# Altium PCB bmsMaster.PcbDoc (part 2 of 2)
Units mil, origin at the board's own origin, x right, y up, seen from the top; angles counter-clockwise.
Board outline 3600 x 5400 mil, 4 copper layers (Signal 1, Ground, Power, Signal 2), stack 65.512 mil thick; 132 components, 81 nets, 422 pads, 130 vias.
Unrouted connection lines stored in the file: 1.
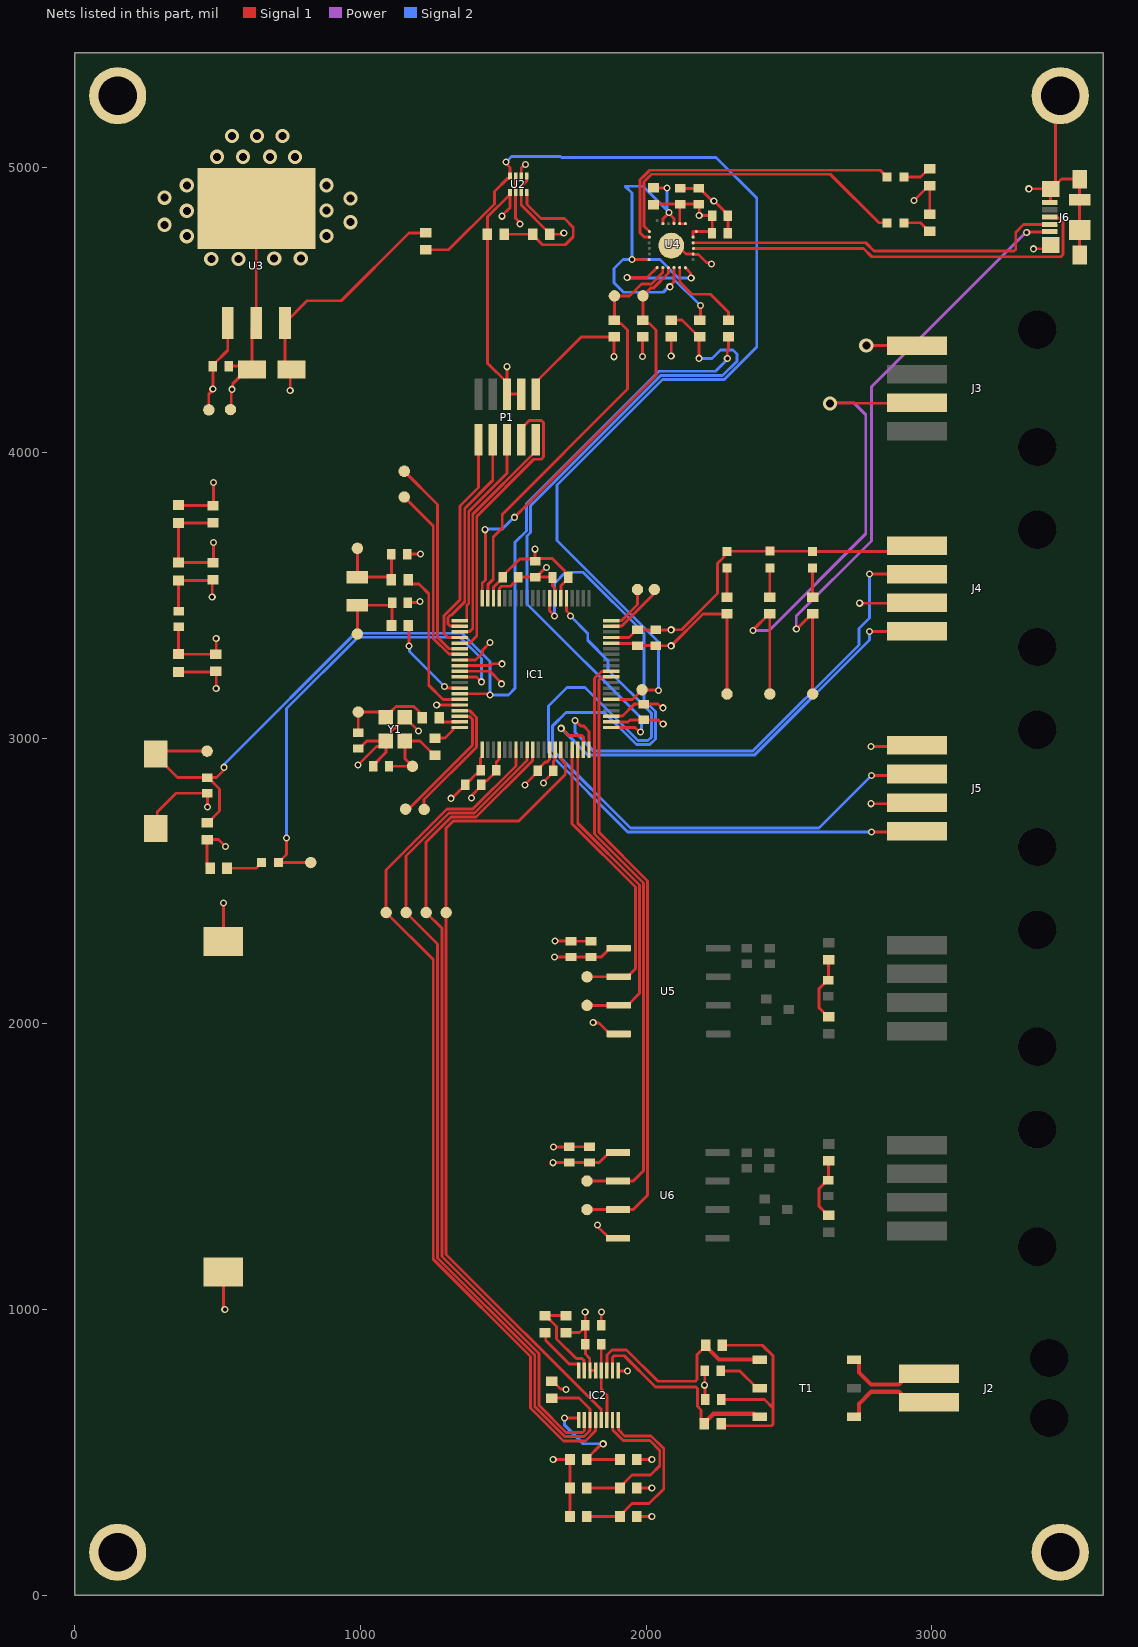
[diagram p4: the nets of this part, all layers, seen from the top]

## Via types
v1: diameter 25, hole 14, Signal 1 to Signal 2, tented both sides, 107 vias
v2: diameter 50, hole 28, Signal 1 to Signal 2, 21 vias
v3: diameter 50, hole 28, Signal 1 to Signal 2, tented both sides, 2 vias

## Nets (pads, with @x,y where several pads share a name; then routed paths per layer and width w, separated by ;. In a path a pad name is that pad's centre, name@x,y a point inside that pad or via, vN(x,y) a via of type N, cw(c..) or ccw(c..) an arc to the next point about the centre after c; other vN are vias at no path point) (continued)
GND: C1.1 C2.1 C3.1 C4.2 C5.1 C7.1 C8.1 C9.1 C10.1 C11.1 C12.1 C13.1 C14.1 C15.1 C16.2 C17.1 C18.1 C19.1 C20.1 C21.1 C22.2 C23.2 C24.1 C25.1 C27.2 C28.2 C32.2 C33.2 D4.1 D5.1 D6.1 IC1.24 IC1.33 IC1.43 IC1.57 IC1.66 IC1.78 IC2.13 IC2.14 J1.1 J3.1 J4.1 J5.1 J6.5 J6.6 J6.7 J6.8 J6.9 J6.10 J6.11 L3.1 P1.3 P1.5 pad.PTH1 pad.PTH2 pad.PTH3 pad.PTH4 R5.1 R10.1 R21.1 R22.1 R23.1 R25.2 R37.1 R38.1 TP14.1 U1.2 U2.1 U3.2 U3.4 U4.2 U4.25 U5.4 U6.4 Y1.2 Y1.4 | length 8373.2
  Signal 1 w10: pad.PTH1@150,5250 pad.PTH1@175.79,5250 ; J1.1@283.27,2685.08 288.46,2690.28 288.46,2741.46 354.44,2807.44 C15.1@463.27,2807.44 464,2806.71 v1(464,2759) ; L3.1@363.27,3232.01 489.8,3232.01 R5.1@493.27,3235.47 495,3233.74 v1(495,3175) ; v1@520,1007.71 U1.2@520,1131.26 ; C17.1@538.56,4303 608,4303 C16.2@620.1,4290.9 ; TP14.1@545,4151 547.5,4153.5 547.5,4219.5 v1(550,4222) 552.87,4224.87 552.87,4241.38 602.39,4290.9 C16.2@620.1,4290.9 ; U3.4@635.27,4855.48 U3.2@635.27,4453.91 620.1,4438.74 C16.2@620.1,4290.9 ; v1(991,2906) 1056.04,2971.04 1068.21,2971.04 1075.66,2978.48 Y1.2@1075.66,2990.66 ; C4.2@992.27,2964.44 996.01,2964.44 1022.23,2990.66 Y1.2@1075.66,2990.66 ; C5.1@1044.71,2902 1044.71,2905.74 1088.8,2949.83 Y1.2@1088.8,2990.66 ; C8.1@1163.39,3645 v1(1210,3645) ; C7.1@1165.83,3475 v1@1202.29,3475 ; v1(1203,3025) 1203,3026.07 Y1.4@1155.73,3073.34 1127.39,3045 1127.39,3042.36 1119.78,3034.75 1117.14,3034.75 1107.13,3024.73 1107.13,3008.98 Y1.2@1088.8,2990.66 ; v1(1389,2791) 1391.87,2793.87 1391.87,2802.57 1422.56,2833.26 C12.1@1422.56,2837 1422.56,2840.74 1432.32,2850.5 1441.8,2850.5 1475.56,2884.26 C13.1@1475.56,2888 1475.56,2916.33 1484.54,2925.3 1484.54,2958.94 IC1.24@1485.31,2959.72 ; IC1.78@1465.63,3490.28 1466.41,3491.06 1466.41,3529.23 1497.44,3560.26 C1.1@1497.44,3564 1497.44,3567.74 1557.7,3628 1603.56,3628 C3.1@1611,3620.56 ; v1(1496,4828) 1496,4830 1523.74,4857.74 U2.1@1523.74,4904.37 ; v1(1513,4301) 1513.13,4300.87 P1.5@1513.13,4245.61 ; U2.1@1523.74,4911.06 U2.1@1523.74,4904.37 ; P1.3@1563.27,4205.12 P1.5@1513.27,4205.12 1513.13,4205.25 P1.5@1513.13,4245.61 ; v1(1576,2837) 1576,2837.82 1620.44,2882.26 C14.1@1620.44,2886 1620.44,2889.74 1648.39,2917.69 1654.09,2917.69 1661.7,2925.3 1661.7,2958.94 IC1.33@1662.48,2959.72 ; v1(1611,3662) C3.1@1611,3620.56 ; v1(1675,475) R21.1@1733.74,475 R22.1@1733.74,375 R23.1@1733.74,275 ; v1(1676,1569) 1676.5,1569.5 1730.77,1569.5 C32.2@1731.27,1570 C33.2@1802,1570 C33.2@1803,1571 ; v1(1681,2290) 1681.22,2289.78 1737.05,2289.78 C27.2@1737.27,2289.56 C28.2@1807.27,2289.56 C28.2@1807.99,2290.28 ; IC1.66@1701.85,3490.28 1702.61,3491.04 1702.61,3534.31 1727.56,3559.26 1717.8,3569.02 1717.8,3583.1 1671.57,3629.32 1621.76,3629.32 C3.1@1612,3619.56 C3.1@1611,3620.56 ; R25.2@1719.27,919.47 1766.39,919.47 C23.2@1787.22,940.31 ; v1(1787,991) 1787.22,990.78 C23.2@1787.22,940.31 ; v1(1815,2005) 1816.91,2003.09 1835.46,2003.09 1873.54,1965 U5.4@1904.06,1965 ; IC2.13@1823.43,787.09 IC2.14@1803.74,787.09 1802.96,787.87 1802.96,828.98 1787.44,844.5 C22.2@1787.44,878 1787.44,940.53 C23.2@1787.22,940.31 ; v1(1830,1296) 1831.91,1294.09 1831.91,1289.36 1871.28,1250 U6.4@1901.79,1250 ; IC1.43@1878.54,3077.36 1879.32,3078.14 1917.08,3078.14 1958.5,3119.56 C10.1@1992,3119.56 1992.22,3119.78 2042.16,3119.78 2054.94,3107 v1(2059,3107) ; IC1.57@1878.54,3352.95 1939.65,3352.95 1966.26,3379.56 C11.1@1970,3379.56 C9.1@2034,3379.56 2034.22,3379.78 2087.78,3379.78 v1(2088,3380) 2124,3380 2250.58,3506.58 2250.58,3612.67 2272.52,3634.61 2272.52,3643.78 2283.74,3655 D5.1@2433.27,3655 2582.8,3655 D6.1@2583.27,3654.53 2928.03,3654.53 J4.1@2948.5,3675 ; U4.25@2088.27,4725 2110.01,4725 2139.54,4695.47 U4.2@2165.04,4695.47 2165.21,4695.47 2166.58,4694.1 2183.5,4694.1 2211.62,4665.98 v1@2221.31,4665.98 ; C18.1@2119.73,4925.56 C19.1@2184,4925.56 2187.74,4925.56 2229.43,4883.87 2234.13,4883.87 v1(2237,4881) 2238.45,4881 2286.35,4833.09 2286.35,4768.35 C20.1@2286,4768 ; C25.1@2205.71,785 2205.35,784.65 2205.35,735.35 v1(2205,735) 2206.22,733.78 2206.22,686.22 C24.1@2207.44,685 ; v3(2771,4375) J3.1@2948.5,4375 ; v1(2788,2971) 2944.5,2971 J5.1@2948.5,2975 ; v1(2938,4883) 2938.31,4883 2990.31,4935 R37.1@2993.27,4935 R38.1@2993.27,4834.53 ; v1(3340,4924) 3415.55,4924 J6.7@3416.61,4922.93 ; v1(3356,4714) 3403.55,4714 J6.6@3416.61,4727.07 ; J6.5@3413.27,4876.18 3416.61,4879.53 J6.7@3416.61,4922.93 ; J6.7@3434.02,4940.33 3434.02,5234.02 pad.PTH2@3450,5250 ; J6.8@3517.99,4692.13 J6.9@3517.99,4779.72 J6.10@3517.99,4886.02 J6.11@3517.99,4957.87 3454.02,4957.87 3419.07,4922.93 J6.7@3416.61,4922.93 ; Y1.2@1075.66,2990.66 Y1.2@1088.8,2990.66 ; P1.5@1513.13,4245.61 1444.21,4314.53 R10.1@1444.21,4765 1444.21,4824.84 U2.1@1523.74,4904.37
  other v1: 525,1000 1209,3479 2229,4661
  other v2: 478,4678 573,4678 698,4680 791,4680 392,4758 881,4759 314,4798 965,4807 392,4847 881,4848 965,4890 314,4893 392,4936 881,4936 771,5035 498,5036 589,5036 683,5036 550,5109 638,5109 727,5109
ISO_EN: IC2.1 R18.1 R21.2 | length 440.5
  Signal 1 w10: v1(1715,620) 1763.46,620 1764.37,619.09 IC2.1@1764.37,612.91 ; v1(1850,530) 1848.09,528.09 1842.93,528.09 1792.8,477.95 R21.2@1792.8,475 R18.1@1908.74,475
  Signal 2 w10: v1(1715,620) 1715,595 1780,530 v1(1850,530)
ISO_Ix_N: IC2.10 R28.1 T1.3 | length 738.6
  Signal 1 w10: IC2.10@1883.26,786.31 1882.8,786.77 1882.8,832.48 1888.65,838.34 1923.66,838.34 2033.07,728.93 2173.82,728.93 2179.68,723.07 2179.68,661.11 2192.01,648.78 2192.01,611.73 R28.1@2203.74,600
  Signal 1 w15: R28.1@2203.74,602.95 2235.97,635.19 2378.08,635.19 2388.27,625 T1.3@2398.31,625
ISO_Ix_P: IC2.11 R27.2 T1.1 | length 767.3
  Signal 1 w10: IC2.11@1863.57,787.87 IC2.11@1862.8,787.09 1862.8,840.76 1880.37,858.34 1931.95,858.34 2041.36,748.93 2172.09,748.93 2177.94,754.78 2177.94,841.72 2208.27,872.05 R27.2@2208.27,875
  Signal 1 w15: R27.2@2208.27,872.05 2255.31,825 T1.1@2398.31,825
ISO_PHA: IC2.8 R20.1 R23.2 | length 672.7
  Signal 1 w10: R23.2@1792.8,275 R20.1@1908.74,275 1908.74,277.95 1951.22,320.43 2010.43,320.43 2062,372 2062,513 2017.44,557.56 1924.44,557.56 1903.07,578.93 1903.07,612.01 IC2.8@1902.17,612.91
ISO_POL: IC2.7 R19.1 R22.2 | length 572.2
  Signal 1 w10: R22.2@1792.8,375 R19.1@1908.74,375 1908.74,377.95 1951.06,420.27 2015.27,420.27 2048,453 2048,507 2013.2,541.8 1920.2,541.8 1883.26,578.74 1883.26,612.13 IC2.7@1882.48,612.91
ISO_xA_N: J2.2 T1.4 | length 338.4
  Signal 1 w15: T1.4@2728.23,625 2738.27,625 2745.73,632.46 2745.73,669.73 2788.5,712.5 2884.62,712.5 2893.41,703.71 2893.41,699.98 2918.39,675 J2.2@2990.83,675
ISO_xA_P: J2.1 T1.6 | length 339
  Signal 1 w15: T1.6@2728.23,825 2738.27,825 2745.73,817.54 2745.73,779.27 2787.5,737.5 2884.62,737.5 2893.41,746.29 2893.41,750.02 2918.39,775 J2.1@2990.83,775
MCU_CAN_RX1: IC1.37 TP26.1 U5.2 | length 1039.7
  Signal 1 w10: IC1.37@1741.22,2959.72 1741.22,2700.99 1963,2479.21 1963,2193.43 1934.57,2165 U5.2@1904.06,2165 TP26.1@1793.27,2165
MCU_CAN_RX2: IC1.51 TP28.1 U6.2 | length 2076.3
  Signal 1 w10: TP28.1@1793.27,1450 U6.2@1901.79,1450 1955,1450 1991,1486 1991,2493.63 1820,2664.63 1820,3210.05 1844.01,3234.06 1877.76,3234.06 IC1.51@1878.54,3234.84
MCU_CAN_TX1: IC1.38 TP25.1 U5.3 | length 1143.1
  Signal 1 w10: IC1.38@1760.91,2959.72 1760.91,2702.52 1977,2486.42 1977,2107.43 1934.57,2065 U5.3@1904.06,2065 TP25.1@1793.27,2065
MCU_CAN_TX2: IC1.50 TP27.1 U6.3 | length 2155.8
  Signal 1 w10: TP27.1@1793.27,1350 U6.3@1901.79,1350 1955,1350 2005,1400 2005,2500.85 1835,2670.85 1835,3205.25 1844.12,3214.38 1877.76,3214.38 IC1.50@1878.54,3215.16
MCU_ISO_SPI0_MISO: IC1.29 IC2.3 R26.1 TP22.1 | length 3184.3
  Signal 1 w10: IC1.29@1583.74,2959.72 1582.96,2958.94 1582.96,2921.76 1399.2,2738 1310.57,2738 1160,2587.43 TP22.1@1160,2390 1270,2280 1270,1180.8 1610,840.8 1610,660.2 1715.2,555 1782.48,555 1803.74,576.26 1803.74,651.26 1765,690 R26.1@1670,690
MCU_ISO_SPI0_MOSI: IC1.30 IC2.2 TP21.1 | length 2901.4
  Signal 1 w10: IC1.30@1603.43,2959.72 1602.65,2958.94 1602.65,2921.65 1405,2724 1317.79,2724 1230,2636.21 TP21.1@1230,2390 1285,2335 1285,1185.6 1625,845.6 1625,665 1720,570 1777.11,570 1784.06,576.94 IC2.2@1784.06,612.91
MCU_ISO_SPI0_nCS: IC1.35 IC2.5 TP24.1 | length 2884.9
  Signal 1 w10: IC1.35@1701.85,2959.72 1702.63,2958.94 1702.63,2925.3 1717,2910.93 1717,2873 1554,2710 1325,2710 1300,2685 TP24.1@1300,2390 1300,1193 1843.11,649.89 IC2.5@1843.11,612.91
MCU_ISO_SPI0_SCK: IC1.27 IC2.4 TP23.1 | length 3082.8
  Signal 1 w10: IC1.27@1544.37,2959.72 1544.37,2902.97 1393.4,2752 1303.36,2752 1090,2538.64 TP23.1@1090,2390 1255,2225 1255,1176 1595,836 1595,655.4 1710.4,540 1788,540 1823.43,575.43 IC2.4@1823.43,612.91
MCU_JTAG_nTRST: IC1.4 P1.10 | length 789.4
  Signal 1 w10: IC1.4@1347.99,3352.95 1307.05,3352.95 1291.96,3368.04 1291.96,3429.1 1347.99,3485.13 1347.99,3812.99 1413.27,3878.27 P1.10@1413.27,4044.88
MCU_JTAG_TCK: IC1.5 P1.4 | length 1060.8
  Signal 1 w10: IC1.5@1347.99,3333.27 1348.77,3334.05 1382.41,3334.05 1407,3358.64 1407,3777.05 1606.91,3976.96 1633.22,3976.96 1640.83,3984.58 1640.83,4105.19 1633.22,4112.8 1590.83,4112.8 1563.27,4085.24 P1.4@1563.27,4044.88
MCU_JTAG_TDI: IC1.2 P1.8 | length 757.3
  Signal 1 w10: IC1.2@1347.99,3392.32 1347.21,3393.1 1313.57,3393.1 1305.96,3400.72 1305.96,3423.3 1313.57,3430.91 1317.81,3430.91 1365,3478.1 1365,3805 1463.27,3903.27 P1.8@1463.27,4044.88
MCU_JTAG_TDO: IC1.1 P1.6 | length 714.9
  Signal 1 w10: IC1.1@1347.99,3412.01 1371.12,3412.01 1372.03,3412.91 1372.03,3465.33 1379,3472.3 1379,3794 1513.27,3928.27 P1.6@1513.27,4044.88
MCU_JTAG_TMS: IC1.3 P1.2 | length 801.8
  Signal 1 w10: IC1.3@1347.99,3372.64 1348.77,3373.42 1382.41,3373.42 1393,3384.01 1393,3784.26 1613.27,4004.53 P1.2@1613.27,4044.88
MCU_nNMI: IC1.41 R13.1 R17.1 | length 2384.6
  Signal 1 w10: IC1.41@1878.54,3037.99 1960.95,3037.99 1976.94,3022 v1(1981,3022) ; R13.1@2088.27,4464.53 2126.26,4464.53 2185.31,4405.47 R17.1@2188.27,4405.47 2185.68,4402.88 v1(2185.68,4330.68)
  Signal 2 w10: v1(1981,3022) 1983.87,3024.87 1983.87,3048.93 1986.36,3051.41 1986.36,3068 1583.5,3470.86 1583.5,3708.59 1595.5,3720.59 1595.5,3814.29 2051.21,4270 2268,4270 2318,4320 2318,4346 2304,4360 2260.53,4360 2230.53,4330 2186.36,4330 v1(2185.68,4330.68)
MCU_nRST: C15.2 IC1.14 J1.2 R8.1 R16.1 TP13.1 | length 3825.6
  Signal 1 w10: R8.1@463.27,2704.53 466.22,2704.53 507,2745.31 507,2822.57 C15.2@467.01,2862.56 ; TP13.1@463.27,2955 293.35,2955 J1.2@283.27,2944.92 283.27,2939.02 359.72,2862.56 495.56,2862.56 520.41,2887.41 520.41,2896.76 v1(522.32,2898.68) ; IC1.14@1347.99,3156.1 IC1.14@1347.99,3156.1 1447.24,3156.05 1451.29,3152 v1(1454,3152) ; v1(2284.46,4330) 2284.46,4358.96 2288,4362.5 2288,4405.2 R16.1@2288.27,4405.47
  Signal 2 w10: v1(522.32,2898.68) 524.24,2900.59 524.24,2910.24 982,3368 1355,3368 1406.54,3316.46 1454,3269 v1(1454,3152) 1518,3152 1541.5,3175.5 1541.5,3686.39 1581.5,3726.39 1581.5,3821.5 2045,4285 2243,4285 2284.46,4326.46 v1(2284.46,4330)
MCU_nRSTOUT: D3.1 IC1.11 TP7.1 | length 1645.6
  Signal 1 w10: v1(741,2651) 741,2593.2 D3.1@712.8,2565 TP7.1@826,2565 ; IC1.11@1347.99,3215.16 1348.07,3215.08 1405.72,3215.08 1422.8,3198 v1(1424,3198)
  Signal 2 w10: v1(741,2651) 741,3104 991,3354 1349,3354 1424,3279 v1(1424,3198)
MCU_RTCX1: IC1.13 R6.1 | length 322.3
  Signal 1 w10: R6.1@1167.8,3395 1170,3392.8 v1(1170,3323) ; v1(1294.41,3181) 1297.12,3181 1302.43,3175.69 1347.89,3175.69 IC1.13@1347.99,3175.79
  Signal 2 w10: v1(1170,3323) 1171.91,3321.09 1171.91,3303.5 v1(1294.41,3181)
MCU_RTCX2: IC1.15 R7.1 | length 543.2
  Signal 1 w10: R7.1@1167.32,3555 1167.32,3552.05 1179.06,3540.31 1204.69,3540.31 1239,3506 1239,3186 1288.58,3136.42 IC1.15@1347.99,3136.42
MCU_RXD0: IC1.80 R15.1 TP20.1 U4.21 | length 1513.8
  Signal 1 w10: IC1.80@1426.26,3490.28 1426.26,3543.26 1437.5,3554.5 1437.5,3729.43 v1(1436.54,3730.39) ; v1(1539,3774) 1662.13,3897.13 1662.13,3898.02 2035,4270.9 2035,4430 2012.2,4452.8 2000,4452.8 R15.1@1988.27,4464.53 1989,4465.26 TP20.1@1989,4549 2016.05,4576.05 2024.87,4576.05 2078.3,4629.48 2078.3,4647.5 U4.21@2078.43,4647.62
  Signal 2 w10: v1(1436.54,3730.39) 1438.65,3732.5 1496.6,3732.5 1538.1,3774 v1(1539,3774)
MCU_RXD2: IC1.40 J4.2 | length 1777.1
  Signal 1 w10: v1(1751,3063) 1771.45,3042.55 1781.74,3042.55 1800.28,3024.02 IC1.40@1800.28,2959.72 ; v1(2782,3575) J4.2@2948.5,3575
  Signal 2 w10: v1(1751,3063) 1751,3021 1817,2955 2373.14,2955 2745,3326.86 2745,3384 2782,3421 v1(2782,3575)
MCU_RXD3: IC1.68 J5.2 | length 2974.8
  Signal 1 w10: IC1.68@1662.48,3490.28 1662.48,3446.24 1679,3429.72 v1(1679,3428) ; v1(2789,2870) 2943.5,2870 J5.2@2948.5,2875
  Signal 2 w10: v1(1679,3428) 1679,3542.47 1718.03,3581.5 1779.5,3581.5 1992.5,3368.5 1992.5,3133.61 2032.5,3093.61 2032.5,2997.7 2012.8,2978 1966.31,2978 1853.81,3090.5 1719.61,3090.5 1673,3043.89 1673,2958 1945,2686 2605,2686 v1(2789,2870)
MCU_TXD0: IC1.79 R14.1 TP19.1 U4.20 | length 1509
  Signal 1 w10: IC1.79@1445.94,3490.28 1445.94,3537.94 1465,3557 1465,3705 1496.3,3736.3 1496.3,3784.2 1935,4222.89 1935,4430 1912.2,4452.8 1900,4452.8 R14.1@1888.27,4464.53 1889,4465.26 TP19.1@1889,4549 1942,4549 1984.05,4591.05 2018.65,4591.05 2058.62,4631.01 2058.62,4648.11 U4.20@2058.74,4648.23
MCU_TXD2: IC1.39 J4.4 | length 1616.3
  Signal 1 w10: v1(1703,3035) 1728.38,3009.62 1774.73,3009.62 1780.59,3003.76 IC1.39@1780.59,2959.72 ; v1(2782,3374) 2947.5,3374 J4.4@2948.5,3375
  Signal 2 w10: v1(1703,3035) 1797,2941 2378.94,2941 2782,3344.06 v1(2782,3374)
MCU_TXD3: IC1.65 J5.4 | length 2648.9
  Signal 1 w10: IC1.65@1721.54,3490.28 1721.54,3445.52 1735,3432.06 v1(1735,3428) ; v1(2789,2672) 2945.5,2672 J5.4@2948.5,2675
  Signal 2 w10: v1(1735,3428) 1795.55,3367.45 1795.55,3343.45 1867.23,3271.77 1867.23,3239.08 2018.5,3087.81 2018.5,3003.5 2007,2992 1972.11,2992 1786.11,3178 1723,3178 1658,3113 1658,2950 1936,2672 v1(2789,2672)
MCU_VBAT: IC1.16 U1.1 | length 215.8
  Signal 1 w10: U1.1@520,2288.74 521,2289.74 v1(521,2423) ; v1(1267,3117) 1267.13,3116.87 1347.86,3116.87 IC1.16@1347.99,3116.73
MCU_VDDA: IC1.8 L1.1 L2.2 R1.1 R4.2 | length 587.1
  Signal 1 w10: R1.1@483.27,3755.47 481.3,3753.5 L1.1@363.27,3753.5 L2.2@363.27,3615 R4.2@483.27,3615 485,3616.73 v1(485,3685) ; IC1.8@1347.99,3274.21 1403.21,3274.21 1427.17,3298.17 1427.17,3308.17 v1(1454,3335)
MCU_VREFP: C6.2 IC1.10 L2.1 R4.1 | length 453.2
  Signal 1 w10: C6.2@363.27,3445 L2.1@363.27,3552.01 479.33,3552.01 R4.1@481,3553.68 ; v1(481,3495) R4.1@481,3553.68 ; R4.1@483.27,3555.94 R4.1@481,3553.68 ; IC1.10@1347.99,3234.84 1453.16,3234.84 1494,3194 v1(1494,3191)
MCU_VSSA: C6.1 IC1.9 L3.2 R5.2 | length 432.1
  Signal 1 w10: C6.1@363.27,3389.88 L3.2@363.27,3295 363.74,3294.53 R5.2@493.27,3294.53 495,3296.26 v1(495,3350) ; IC1.9@1347.99,3254.53 1455.5,3254.53 1462.1,3261.13 1495.87,3261.13 v1(1496,3261)
MCU_XTAL1: IC1.19 R3.2 | length 84.8
  Signal 1 w10: R3.2@1278.2,3074.68 R3.2@1275.53,3072 1275.53,3069.41 1287.26,3057.68 IC1.19@1347.99,3057.68 IC1.19@1347.21,3056.9
MCU_XTAL2: IC1.20 R2.1 | length 107.4
  Signal 1 w10: R2.1@1261,3000.53 1295.69,3000.53 1323.96,3028.8 1323.96,3037.09 1324.86,3037.99 IC1.20@1347.99,3037.99
NetC4_1: C4.1 R3.1 TP2.1 Y1.1 | length 344.4
  Signal 1 w10: C4.1@992.27,3019.56 TP2.1@992.27,3092 1070.14,3092 Y1.1@1088.8,3073.34 1109.39,3093.93 1109.39,3096.57 1124.76,3111.93 1186.71,3111.93 1204.74,3093.9 1204.74,3083.73 R3.1@1216.47,3072
NetC5_2: C5.2 R2.2 TP1.1 Y1.3 | length 307.7
  Signal 1 w10: C5.2@1099.83,2902 TP1.1@1182.27,2902 1155.73,2928.54 Y1.3@1155.73,2990.66 1208.86,2990.66 1258.05,2941.47 R2.2@1261,2941.47
NetC7_2: C7.2 R6.2 TP8.1 Y2.1 | length 301.6
  Signal 1 w10: TP8.1@989.13,3365.21 Y2.1@989.13,3466 1105.45,3466 1110.71,3471.26 1110.71,3396.97 R6.2@1108.74,3395
NetC8_2: C8.2 R7.2 TP9.1 Y2.2 | length 325.6
  Signal 1 w10: TP9.1@989.13,3665.21 Y2.2@989.13,3564.43 1096.54,3564.43 1101.69,3559.27 1101.69,3548.43 R7.2@1108.27,3555 C8.2@1108.27,3645
NetC24_2: C24.2 R27.1 R28.2 | length 818.1
  Signal 1 w10: C24.2@2260.83,696.26 C24.2@2260.83,700 ; C24.2@2262.56,685 2414.14,685 2445,654.14 ; R28.2@2262.8,600 2269.8,593 2439.14,593 2445,598.86 2445,654.14 ; R27.1@2267.32,875 2407,875 2445,837 2445,654.14
NetC25_2: C25.2 T1.2 | length 166.1
  Signal 1 w10: C25.2@2260.83,781.26 C25.2@2260.83,785 2328.27,785 2388.27,725 T1.2@2398.31,725
NetC26_2: C26.2 R29.1 R30.2 | length 233.9
  Signal 1 w10: R30.2@2640,2024.53 2637.05,2024.53 2605,2056.57 2605,2123.03 2634.53,2152.56 C26.2@2638.27,2152.56 2638.27,2223.74 R29.1@2640,2225.47
NetC31_2: C31.2 R31.1 R32.2 | length 223.9
  Signal 1 w10: R32.2@2640,1329.53 2637.05,1329.53 2605,1361.57 2605,1423.03 2634.53,1452.56 C31.2@2638.27,1452.56 2638.27,1518.74 R31.1@2640,1520.47
NetD3_2: D3.2 R33.1 | length 129.2
  Signal 1 w10: R33.1@532.8,2545 633.74,2545 D3.2@653.74,2565
NetD4_2: D4.2 R34.1 | length 100.9
  Signal 1 w10: R34.1@2283.27,3494.53 D4.2@2283.27,3595.47
NetD5_2: D5.2 R35.1 | length 101.4
  Signal 1 w10: R35.1@2433.27,3494.53 D5.2@2433.27,3595.94
NetD6_2: D6.2 R36.1 | length 100.9
  Signal 1 w10: R36.1@2583.27,3494.53 D6.2@2583.27,3595.47
NetD7_1: D7.1 R37.2 | length 102.5
  Signal 1 w10: D7.1@2902.8,4965 2961.26,4965 2990.31,4994.06 R37.2@2993.27,4994.06
NetD8_1: D8.1 R38.2 | length 102.7
  Signal 1 w10: D8.1@2902.8,4805 2960.79,4805 2990.31,4775.47 R38.2@2993.27,4775.47
NetIC1_6: IC1.6 TP5.1 | length 724.1
  Signal 1 w10: TP5.1@1153.27,3935 1270,3818.27 1270,3354 1310.42,3313.58 IC1.6@1347.99,3313.58
NetIC1_7: IC1.7 TP6.1 | length 653.8
  Signal 1 w10: TP6.1@1153.27,3845 1255,3743.27 1255,3349.2 1309.52,3294.68 1347.21,3294.68 IC1.7@1347.99,3293.9
NetIC1_17: IC1.17 TP12.1 | length 465.6
  Signal 1 w10: TP12.1@1223,2751 1223,2786 1406,2969 1406,3072.79 1382.53,3096.27 1348.77,3096.27 IC1.17@1347.99,3097.05
NetIC1_18: IC1.18 TP11.1 | length 466.1
  Signal 1 w10: TP11.1@1158,2752 1166.12,2752 1175.87,2761.75 1177.75,2761.75 1392,2976 1392,3066.99 1382.41,3076.58 1348.77,3076.58 IC1.18@1347.99,3077.36
NetIC1_59: IC1.59 TP4.1 | length 211.8
  Signal 1 w10: IC1.59@1878.54,3392.32 1879.32,3393.1 1914.9,3393.1 2023.26,3501.46 2023.26,3515.26 TP4.1@2029,3521
NetIC1_60: IC1.60 TP3.1 | length 167.6
  Signal 1 w10: IC1.60@1878.54,3412.01 1879.45,3412.91 1914.91,3412.91 1970,3468 TP3.1@1970,3521
NetIC2_15: IC2.15 R24.2 R25.1 | length 332.3
  Signal 1 w10: R24.2@1646,978.53 R24.2@1648.95,978.53 ; R25.1@1719.27,978.53 R24.2@1648.95,978.53 ; IC2.15@1784.06,787.09 1783.28,787.87 1783.28,820.52 1775.66,828.14 1755.8,828.14 1686.58,897.36 1686.58,940.9 R24.2@1648.95,978.53
NetIC2_16: IC2.16 R24.1 | length 201
  Signal 1 w10: R24.1@1646,919.47 1648.95,916.52 1648.95,891.05 1730.06,809.94 1763.46,809.94 1764.37,809.04 IC2.16@1764.37,787.09
NetR9_1: R9.1 R10.2 U2.4 | length 540.7
  Signal 1 w10: R10.2@1503.27,4765 R9.1@1603.27,4765 1603.27,4762.05 1637.31,4728 1717,4728 1745,4756 1745,4789 1714,4820 1632,4820 1582.8,4869.2 U2.4@1582.8,4911.06
NetR12_1: R12.1 U4.9 U4.11 U4.18 U4.22 U4.24 | length 1442.7
  Signal 1 w10: v1(1951,4676) 1983.06,4676 1983.27,4675.79 U4.18@2010.89,4675.79 ; R12.1@2026,4927.53 2026.53,4927 v1(2073,4927) ; U4.11@2058.74,4801.77 2058.86,4801.89 2058.86,4818.99 v1(2080.88,4841) 2080.88,4836.94 2097.99,4819.83 2097.99,4802.5 U4.9@2098.11,4802.38 ; v1(2083,4581) 2083,4583.71 2098.11,4598.82 U4.22@2098.11,4648.23 ; U4.24@2137.48,4647.62 2156.09,4629.01 2156.09,4613.91 v1(2158,4612)
  Signal 2 w10: v1(2073,4927) 2073,4852.94 2080.88,4845.06 v1(2080.88,4841) 1989.09,4932.8 1927,4932.8 1951,4908.8 v1(1951,4676) ; v1(2083,4581) 2078.94,4581 2059.94,4562 1921,4562 1888,4595 1888,4645 1919,4676 v1(1951,4676) ; v1(2158,4612) 2112.8,4612 2048.8,4676 v1(1951,4676)
NetR16_2: R16.2 U4.23 | length 292.4
  Signal 1 w10: U4.23@2117.8,4648.23 2117.8,4597.2 2160,4555 2225,4555 2288.27,4491.73 R16.2@2288.27,4464.53
NetR17_2: R17.2 U4.19 | length 467.4
  Signal 1 w10: v1(1934,4613) 2003.83,4613 U4.19@2039.06,4648.23 ; R17.2@2188.27,4464.53 2190,4466.26 v1(2190,4515)
  Signal 2 w10: v1(1934,4613) 1935,4612 2093,4612 v1(2190,4515)
P3V3_MAIN: C1.2 C2.2 C3.2 C9.2 C10.2 C11.2 C12.2 C13.2 C14.2 C16.1 C18.2 C19.2 C20.2 C21.2 C22.1 C23.1 C27.1 C28.1 C32.1 C33.1 IC1.21 IC1.34 IC1.42 IC1.56 IC1.67 IC1.77 IC2.6 IC2.9 IC2.12 J4.3 J5.3 L1.2 P1.1 R1.2 R8.2 R11.1 R12.2 R13.2 R14.2 R15.2 R18.2 R19.2 R20.2 R26.2 R33.2 R34.2 TP18.1 U3.3 U4.5 U4.6 U4.7 U4.8 U5.1 U6.1 | length 5379.2
  Signal 1 w10: L1.2@363.27,3816.5 365.24,3814.53 R1.2@483.27,3814.53 486,3817.26 v1(486,3896) ; R33.2@473.74,2545 463.27,2555.47 R8.2@463.27,2645.47 502.53,2645.47 v1(527,2621) ; v1(754,4218) 754,4287 C16.1@757.9,4290.9 735.27,4313.53 U3.3@735.27,4453.91 813.36,4532 933,4532 1170.53,4769.53 R11.1@1228.27,4769.53 ; v1(1317,2790) 1320.44,2790 1353.94,2823.5 1357.68,2823.5 1367.44,2833.26 C12.2@1367.44,2837 ; C12.2@1365.71,2839.01 1377.2,2850.5 1380.94,2850.5 1404.94,2874.5 1410.68,2874.5 1420.44,2884.26 C13.2@1420.44,2888 1420.44,2930.78 1426.26,2936.59 IC1.21@1426.26,2959.72 ; IC1.77@1485.31,3490.28 1486.09,3491.06 1486.09,3524.7 1493.89,3532.5 1524.8,3532.5 1552.56,3560.26 C1.2@1552.56,3564 1553,3564.44 C3.2@1615.74,3564.44 ; P1.1@1613.27,4205.12 1613.27,4245.47 1773.27,4405.47 R14.2@1888.27,4405.47 1888,4405.2 v1(1888,4336) ; v1(1641,2843) 1643.87,2845.87 1643.87,2850.57 1675.56,2882.26 C14.2@1675.56,2886 1675.56,2919.48 1681.39,2925.3 1681.39,2958.94 IC1.34@1682.17,2959.72 ; v1(1651.86,3597.71) 1649.01,3597.71 C3.2@1615.74,3564.44 ; R26.2@1670,749.06 1672.95,749.06 1700.09,721.91 1718.09,721.91 v1(1720,720) ; v1(1674,1514) 1674.44,1514.44 1730.83,1514.44 C32.1@1731.27,1514.88 C33.1@1802,1514.88 1836.16,1514.88 1871.28,1550 U6.1@1901.79,1550 ; v1(1680,2234) 1680.22,2234.22 1737.05,2234.22 C27.1@1737.27,2234.44 C28.1@1807.27,2234.44 1842.98,2234.44 1873.54,2265 U5.1@1904.06,2265 ; IC1.67@1682.17,3490.28 1681.39,3491.06 1681.39,3524.7 1672.44,3533.64 C2.2@1672.44,3563 1671,3564.44 C3.2@1615.74,3564.44 ; C22.1@1842.56,878 1842.83,877.72 1842.83,787.36 IC2.12@1843.11,787.09 1843.11,720.89 1862.8,701.2 IC2.6@1862.8,612.91 ; C23.1@1842.56,944.27 1841.78,945.05 1843.28,946.55 1843.28,990.28 v1(1844,991) ; IC1.42@1878.54,3057.68 1936.77,3057.68 1943.53,3064.44 C10.2@1992,3064.44 1992.28,3064.72 2041.22,3064.72 2055.94,3050 v1(2060,3050) ; IC1.56@1878.54,3333.27 1879.32,3332.49 1961.95,3332.49 C11.2@1970,3324.44 C9.2@2034,3324.44 2034.22,3324.22 2087.78,3324.22 v1(2088,3324) 2199.47,3435.47 R34.2@2283.27,3435.47 TP18.1@2283.27,3155 ; IC2.9@1902.17,787.09 1902.17,785.49 1903.07,784.58 v1(1934.58,784.58) ; R20.2@1967.8,275 v1(2020,275) ; R19.2@1967.8,375 v1(2020,375) ; R18.2@1967.8,475 v1(2020,475) ; v1(1988,4337) 1988,4405.2 R15.2@1988.27,4405.47 ; R12.2@2039,4869.47 2039.97,4870.44 2115.86,4870.44 C18.2@2117.8,4868.5 ; v1(2088,4338) 2088,4405.2 R13.2@2088.27,4405.47 ; U4.7@2137.48,4801.77 U4.8@2117.8,4801.77 C18.2@2117.8,4868.5 ; U4.5@2165.16,4754.65 U4.5@2165.04,4754.53 2164.92,4754.65 2164.92,4774.33 2224.55,4774.33 C20.2@2230.88,4768 2231.59,4768.71 C21.2@2231.59,4829 2230.59,4830 v1(2186,4830) 2186,4868.44 C19.2@2184,4870.44 C18.2@2119.73,4870.44 C18.2@2117.8,4868.5 ; v1(2747.91,3473.09) 2946.59,3473.09 J4.3@2948.5,3475 ; v1(2787,2771) 2944.5,2771 J5.3@2948.5,2775
P5V0_BAT: J3.3 R9.2 R35.2 TP15.1 U2.3 U2.5 | length 2068.7
  Signal 1 w10: U2.5@1582.8,4968.94 1582.41,4968.55 1582.41,4951.48 1563.5,4932.57 1563.5,4911.45 U2.3@1563.11,4911.06 1563.11,4867.17 1662.32,4767.95 R9.2@1662.32,4765 1705.29,4765 1709.29,4769 v1(1712,4769) ; v1(2375,3378) 2375,3380.16 2430.31,3435.47 R35.2@2433.27,3435.47 TP15.1@2433.27,3155 ; v3(2644,4172) 2645,4173 2946.5,4173 J3.3@2948.5,4175
  Power w10: v1(2375,3378) 2431,3378 2769,3716 2769,4133 2727,4175 2647,4175 v3(2644,4172)
P5V0_MAIN: C17.2 TP17.1 U2.2 U2.7 U3.1 | length 540.8
  Signal 1 w10: TP17.1@469,4150 469,4204.94 483,4218.94 v1(483,4223) 483.22,4223.22 483.22,4302.78 C17.2@483.44,4303 483.44,4306.74 535.27,4358.57 U3.1@535.27,4453.91 U3.1@535.27,4489.34 ; U2.7@1543.43,4968.94 U2.2@1543.43,4911.06 1543.43,4819.63 1558,4805.06 v1(1558,4801)
P5V0_USB: J6.1 R36.2 TP16.1 U2.6 | length 2213.3
  Signal 1 w10: U2.6@1563.11,4968.94 1563.11,4996.53 1575.9,5009.32 v1(1578,5009.32) ; v1(2526,3383) 2527.84,3383 2580.31,3435.47 R36.2@2583.27,3435.47 TP16.1@2583.27,3155 ; v1(3332.77,4771.23) 3334.06,4772.53 3411.97,4772.53 J6.1@3413.27,4773.82
  Power w10: v1(2526,3383) 2526,3428 2789,3691 2789,4231 3329.23,4771.23 v1(3332.77,4771.23)
PMUX_ST: IC1.46 R11.2 TP10.1 U2.8 | length 3900.4
  Signal 1 w10: R11.2@1228.27,4710.47 1308.47,4710.47 1469,4871 1469,4914.2 1515.75,4960.94 1522.44,4960.94 1523.74,4962.24 U2.8@1523.74,4968.94 1523.87,4969.07 1523.87,4999.07 1509,5013.94 v1(1509,5018) ; IC1.46@1878.75,3136.21 IC1.46@1878.54,3136.42 1952.42,3136.42 TP10.1@1986,3170 1987,3169 2042,3169 v1(2043,3168)
  Signal 2 w10: v1(1509,5018) 1510.25,5018 1529.07,5036.82 1700.61,5036.82 1703.43,5034 2245.21,5034 2387.5,4891.71 2387.5,4369.7 2273.8,4256 2057.01,4256 1688,3886.99 1688,3692.8 2043,3337.8 v1(2043,3168)
USB_D_N: J6.2 U4.4 | length 1334
  Signal 1 w10: U4.4@2165.04,4734.84 2165.35,4735.16 2769.3,4735.16 2798.44,4706.02 3288.28,4706.02 3294.14,4711.87 3294.14,4771.5 3322.05,4799.41 J6.2@3413.27,4799.41
USB_D_P: J6.3 U4.3 | length 1477.4
  Signal 1 w10: U4.3@2165.65,4715.16 2761.02,4715.16 2790.16,4686.02 3452.51,4686.02 3460.13,4693.63 3460.13,4806.96 3445.82,4821.27 3417,4821.27 J6.3@3413.27,4825
USB_RXT: D8.2 U4.13 | length 1114.6
  Signal 1 w10: U4.13@2011.5,4774.21 1993,4792.71 1993,4949.33 2000.93,4957.26 2001.06,4957.26 2018.8,4975 2645,4975 2815,4805 D8.2@2843.74,4805
USB_TXT: D7.2 U4.14 | length 1112.8
  Signal 1 w10: U4.14@2011.5,4754.53 2011.38,4754.65 1994.28,4754.65 1979,4769.93 1979,4955 1979.31,4955.31 1979.31,4955.44 1995.13,4971.26 1995.26,4971.26 2013,4989 2819.74,4989 D7.2@2843.74,4965
pads on no net: IC1.12 IC1.22 IC1.23 IC1.25 IC1.26 IC1.28 IC1.31 IC1.32 IC1.36 IC1.44 IC1.45 IC1.47 IC1.48 IC1.49 IC1.52 IC1.53 IC1.54 IC1.55 IC1.58 IC1.61 IC1.62 IC1.63 IC1.64 IC1.69 IC1.70 IC1.71 IC1.72 IC1.73 IC1.74 IC1.75 IC1.76 J2. J3. J3.2 J3.4 J4. J5. J6.4 J7. J8. P1.7 P1.9 T1.5 U4.1 U4.10 U4.12 U4.15 U4.16 U4.17

## Polygon pours and split planes (outlines as drawn)
P5V0_USB on Power "P5V0_USB_L03_P010" (solid, pour order 10): 1565.5,4975.5 1596.5,4975.5 1836,5212.5 2836.5,5212.5 3307,4742 3347,4742 3375,4774 3375,4811 2905,5281 1799,5281 1545,5027 1545,4996
P3V3_MAIN on Power "P3V3_MAIN_L03_P016" (solid, pour order 16): 2131,5041 2472,5041 2533,4980 2533,4141 2590,4084 2746,4084 2746,3735 2422,3408 2343,3408 2329.5,3394.5 2329.5,3342 2344.75,3326.75 2557,3326.75 2578.62,3348.37 2578.62,3459 2659,3533 2661,3531 2769,3531 2803,3497 2803,3450 2801,3450 2761,3409 2732,3409 2711,3388 2711,2841 2737,2815 2817,2815 2841,2791 2841,2749 2824,2732 2823,2733 2318,2733 1858,2260.94 1858,1161.46 1982,1034.88 2070.88,1034.88 2124.75,981 2124.75,860.25 2124.75,783 2124.75,564 2124.75,249.75 2027.5,152.5 1875,152.5 927.25,1100.25 927.25,2352 686,2352 474,2564 474,2634 909,3069 1471,3069 1555,3153 1555,3319 1471,3403 1439,3403 1168,3403 796,3775 793,3772 413,3772 321,3864 323,3866 323,3885 1151,4713 1661,4713 1689,4685 1775,4685
P5V0_MAIN on Power "P5V0_MAIN_L03_P001" (solid, pour order 1): 403,4302.19 403,4160 476,4087 1134,4745 1598,4745 1618,4766.36 1618,4900 1585,4933 1033.81,4933
P5V0_BAT on Power "P5V0_BAT_L03_P004" (solid, pour order 4): 2730.48,4161.48 2679,4110 2613,4110 2610,4107 2552,4165 2552,5005 2490,5067 2114,5067 1763,4716 1699,4710 1640,4759 1640,4812 2003,5175 2658,5175 2729.52,5103.48
MCU_VREFP on Power "MCU_VREFP_L03_P015" (solid, pour order 15): 1514,3221 1528,3207 1528,3159 1467,3098 1383,3098 1329,3152 1029,3152 937,3244 403,3244 333,3314 333,3458 407,3528.5 500.5,3528.5 520,3509 520,3476 500.5,3458 430,3458 392,3420 392,3344 430,3306 987.25,3306 1066.94,3221
MCU_VSSA on Power "MCU_VSSA_L03_P012" (solid, pour order 12): 1083.5,3231 1516,3231 1529,3244 1529,3277.55 1514.2,3291 1099.5,3291 1007.5,3383 470.5,3383 455.5,3368 455.5,3340 456.5,3340 478.5,3318 996.5,3318
MCU_VBAT on Power "MCU_VBAT_L03_P006" (solid, pour order 6): 556.75,2432.75 556.75,2408.25 538,2389.5 509.5,2389.5 372,2527 372,2722.12 813.26,3145 1304,3145 1316.5,3132.5 1316.5,3104.5 1299,3087 874,3087 443,2656 443,2556
MCU_VDDA on Power "MCU_VDDA_L03_P008" (solid, pour order 8): 464,3717 442.5,3695.5 442.5,3673 463.5,3652 751,3652 1101,3304 1487,3304 1496,3313 1496,3317 1496,3344 1467,3373 1132,3373 788,3717
CAN_EXT_GND_1 on Power "CAN_EXT_GND_1_L03_P021" (solid, pour order 21): 3067,2326 3040,2298 3040,2264 3063.25,2240.75 3113.25,2240.75 3156.5,2197.5 3156.5,2041.5 3124,2009 3078,2009 3044,2043 3044,2131 3025,2150 2593.5,2150 2529.5,2214 2448,2214 2262,2028 2262,1928 2334,1856 3170,1856 3269,1977 3269,2272 3215,2326
CAN_EXT_5V0_1 on Power "CAN_EXT_5V0_1_L03_P020" (solid, pour order 20): 2564.09,2311.91 2532.91,2311.91 2511.91,2290.91 2511.91,2262.91 2604.83,2170 3045,2170 3064,2151 3064,2053 3085,2032 3116,2032 3137,2053 3137,2191 3106,2222 2654,2222
CAN_EXT_GND_2 on Power "CAN_EXT_GND_2_L03_P018" (solid, pour order 18): 2536,1502 2450,1502 2251,1303 2251,1192 2311,1132 3169,1132 3267,1230 3267,1582 3215,1634 3072,1634 3044,1606 3044,1564 3076,1532 3101,1532 3160,1473 3160,1328 3134,1302 3067,1302 3037,1332 3037,1402 3002,1437 2601,1437
CAN_EXT_5V0_2 on Power "CAN_EXT_5V0_2_L03_P017" (solid, pour order 17): 2507.4,1563.6 2507.4,1587.4 2539,1619 2568,1619 2675,1512 3087,1512 3138,1461 3138,1343 3119,1324 3080,1324 3061,1343 3061,1420 3023,1458 2613,1458
GND on Signal 1 "GND_L01_P023" (solid, pour order 23): 925,4553 926,4553 1170,4797 1171,4796 1371,4796 1454,4879 1454,4933 1483,4962 1483,5365 210,5365 189,5330 231,5288 231,5207 204,5180 92,5180 31,5119 31,3949 314,3949 314,4279 314,4376.38 448.57,4553
GND on Ground (split plane): 3579.9,20.1 20.1,20.1 20.1,5379.9 3579.9,5379.9

## Silkscreen, mask and mechanical layers (free items; w line width, h text height)
Top Overlay:
  region: 6029 vertices and 12 holes, not listed, extent 522.25,552.03 1297.25,1031.68
  text "TX" at 2746.27,4950 h25
  text "RX" at 2746.27,4790 h25
  text "GND" at 2711,4361 h25
  text "NC" at 2778,4261 h25
  text "P5V0_MAIN" at 338.17,4241 h25 r270
  text "9" at 1348,4237 h25
  text "1" at 1665,4235 h25
  text "JTAG" at 1711,4202 h40 r270
  text "+" at 849,4191.34 h40
  text "5V_IN" at 2706,4161.17 h25
  text "NC" at 2778,4063 h25
  text "P3V3_MAIN" at 2270.17,4034 h25 r270
  text "GND" at 515,4029 h25
  text "P5V0_BAT" at 2426,4014 h25 r270
  text "P5V0_USB" at 2570.17,4014 h25 r270
  text "2" at 1663,3996 h25
  text "10" at 1329,3993 h25
  text "POWER" at 2772,3953 h40
  text "GND" at 2711,3662 h25
  text "MCU_RXD2" at 2635,3561.17 h25
  text "3V3_OUT" at 2657,3456.17 h25
  text "MCU_TXD2" at 2631,3360.17 h25
  text "UART 2" at 2743,3252 h40
  text "GND" at 2711,2963 h25
  text "MCU_RXD3" at 2630,2857.17 h25
  text "3V3_OUT" at 2654,2757.17 h25
  text "MCU_TXD3" at 2628,2657.17 h25
  text "UART 3" at 2746,2551 h40
  text "MCU_nRSTOUT" at 626,2470.17 h25
  text "EXT_GND" at 2828,2335.17 h25
  text "+" at 271,2176 h60
  text "CANH" at 2729,2165 h25
  text "EXT_5V" at 2688,2060.17 h25
  text "CANL" at 2733,1959 h25
  text "CAN 1" at 2793,1855 h40
  text "EXT_GND" at 2825,1630.17 h25
  text "CANH" at 2728,1465 h25
  text "EXT_5V" at 2686,1363.17 h25
  text "CANL" at 2732,1260 h25
  text "-" at 265,1191.01 h60
  text "CAN 2" at 2788,1154 h40
  text "PA" at 2796,765 h25
  text "MA" at 2799,661 h25
  text "isoSPI" at 2793,553 h40
  text "Spartan Racing BMS" at 365,434.99 h60
  text "Version 1, Revision B" at 390,336.66 h50
  text "Designed by Vincent Saw" at 330,246.66 h50

## Text inside footprints (layer, text, board x,y; h text height)
J3: Mechanical 13 "NPTH D3.4 +/-0.05" at 3748.5,3925 h40 r90
J4: Mechanical 13 "NPTH D3.4 +/-0.05" at 3748.5,3225 h40 r90
J5: Mechanical 13 "NPTH D3.4 +/-0.05" at 3748.5,2525 h40 r90
J7: Mechanical 13 "NPTH D3.4 +/-0.05" at 3748.5,1825 h40 r90
J8: Mechanical 13 "NPTH D3.4 +/-0.05" at 3748.5,1125 h40 r90